# Altium PCB VariableBenchPowerSupply.PcbDoc
Units mil, origin at the board's own origin, x right, y up, seen from the top; angles counter-clockwise.
Board outline 3500 x 1500 mil, 2 copper layers (Top Layer, Bottom Layer); 36 components, 10 nets, 68 pads, 1 vias.
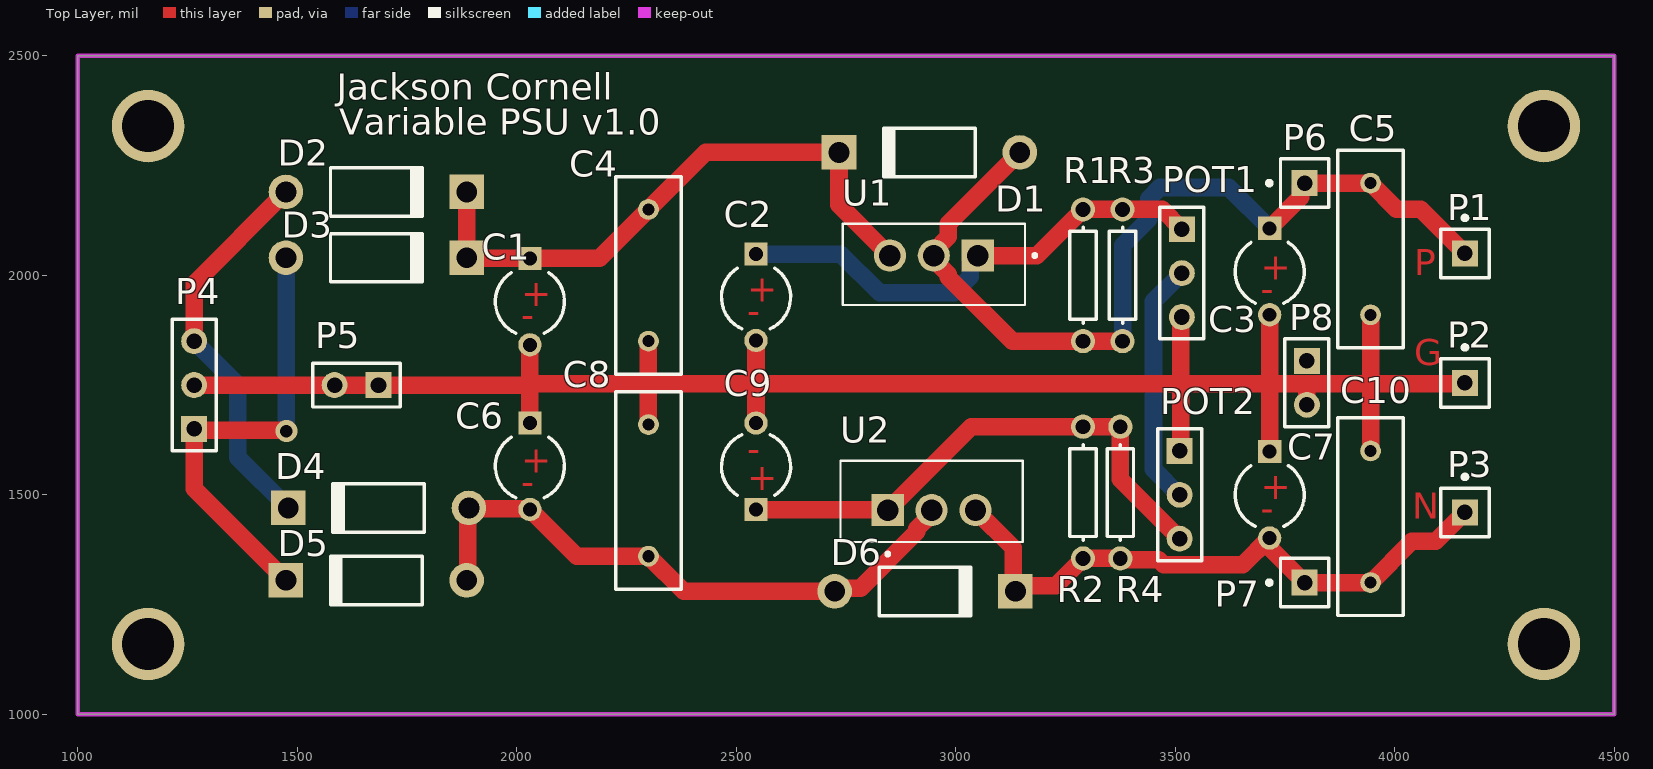
[diagram p0: Top Layer view]
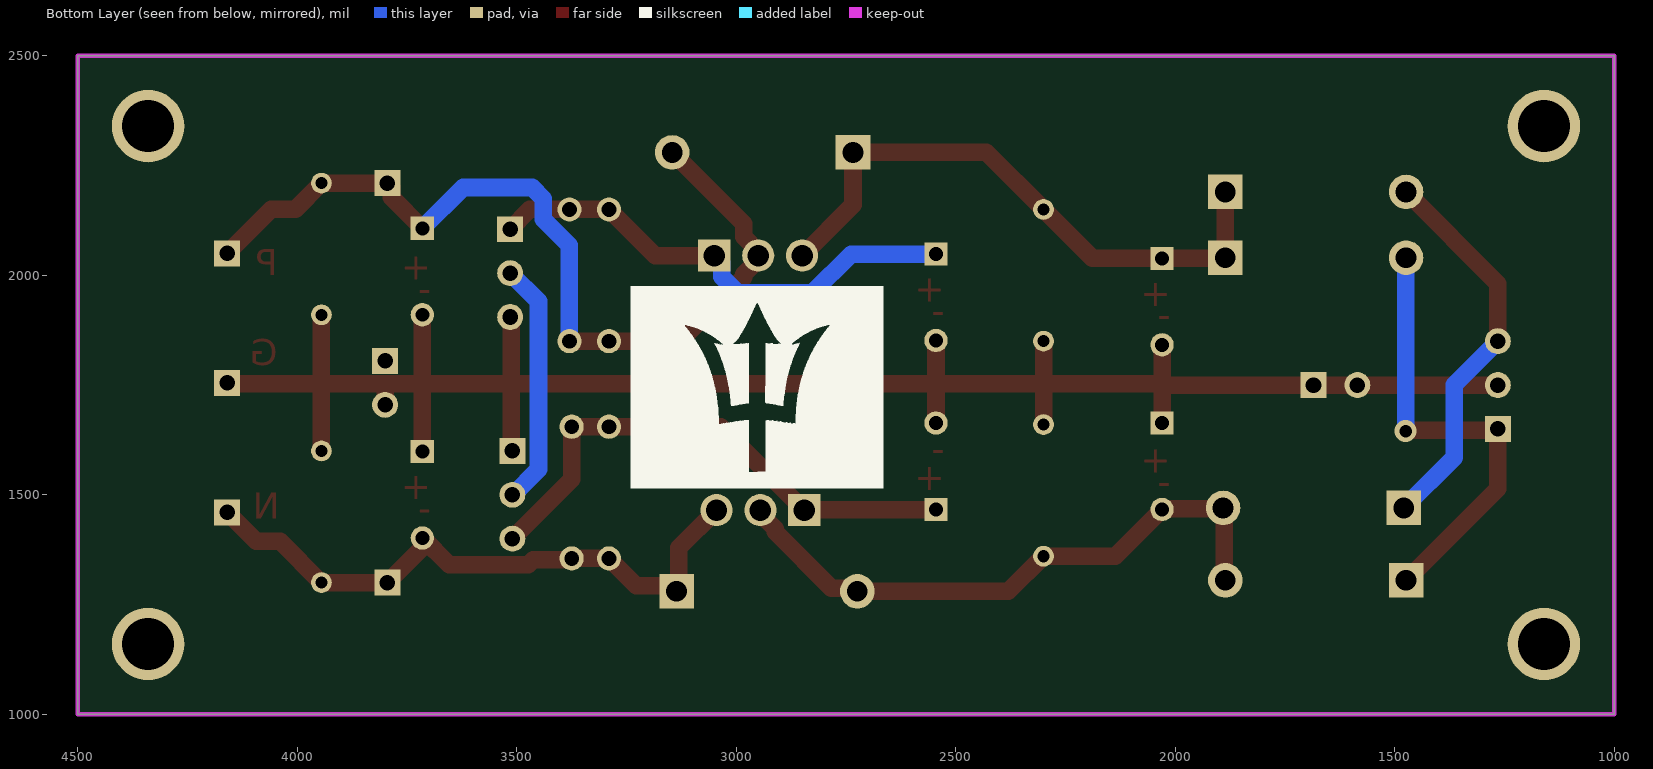
[diagram p1: Bottom Layer view, seen from below]

## Layer stack, top to bottom
Top Solder: solder mask 0.4, Solder Resist, Dk 3.5
Top Layer: signal copper 1.4
Dielectric 1: dielectric 12.6, FR-4, Dk 4.8
Bottom Layer: signal copper 1.4
Bottom Solder: solder mask 0.4, Solder Resist, Dk 3.5

## Board outline
1000,1000 1000,2500 4500,2500 4500,1000

## Design rules (kind name [scope] priority, off if disabled: settings)
Clearance [All] p1: gap=10 ignorepadtopadclearanceinfootprint=FALSE except(0: Arc-Hole Track-Hole SMDPad-Hole THPad-Hole Via-Hole Fill-Hole Poly-Hole Region-Hole Text-Hole)
PolygonConnect [All] p1: connectstyle=Relief reliefconductorwidth=10 reliefentries=4 polygonreliefangle="90 Angle" airgapwidth=10
RoutingVias [All] p1: holewidth=28 width=50 viastyle="Through Hole" minholewidth=28 minwidth=50 maxholewidth=28 maxwidth=50
SolderMaskExpansion [All] p1: expansion=4
Width [All] p1: maxlimit=40 minlimit=40 preferedwidth=40 minimp=50.000000 maximp=50.000000 favimp=50.000000
30 further rules are at their usual default settings.

## Classes and differential pairs
component class VariableBenchPowerSupply: C1 C2 C3 C4 C5 C6 C7 C8 C9 C10 D1 D2 D3 D4 D5 D6 P1 P2 P3 P4 P5 POT1 POT2 R1 R2 U1 U2

## Components (designator, comment, footprint, x,y, rotation, side; value= is the part's Value field where it differs from the comment)
C1 "Cap Pol1" CAPR5-4X5 2030,1940 r270 top value=2200uF
C2 "Cap Pol1" CAPR5-4X5 2545,1950 r270 top value=10uF
C3 "Cap Pol1" CAPR5-4X5 3715,2008.43 r270 top value=470uF
C4 "Cap" RAD-0.3 2300,2000 r90 top value=0.1-1uF
C5 "Cap" RAD-0.3 3945,2060 r270 top value=0.1-1uF
C6 "Cap Pol1" CAPR5-4X5 2030,1565 r270 top value=2200uF
C7 "Cap Pol1" CAPR5-4X5 3715,1500 r270 top value=470uF
C8 "Cap" RAD-0.3 2300,1510 r90 top value=0.1-1uF
C9 "Cap Pol1" CAPR5-4X5 2545,1565 r90 top value=10uF
C10 "Cap" RAD-0.3 3945,1450 r270 top value=0.1-1uF
D1 "Diode 1N4003" DO-41 2940,2280 r180 top
D2 "Diode 1N4003" DO-41 1680,2190 r0 top
D3 "Diode 1N4003" DO-41 1680,2040 r0 top
D4 "Diode 1N4003" DO-41 1685,1470 r180 top
D5 "Diode 1N4003" DO-41 1680,1305 r180 top
D6 "Diode 1N4003" DO-41 2930,1280 r0 top
P1 "Plug" PIN1 4160,2050 r0 top
P2 "Plug" PIN1 4160,1755 r0 top
P3 "Plug" PIN1 4160,1460 r0 top
P4 "Header 3" HDR1X3 1265,1650 r90 top
P5 "Header 2" HDR1X2 1685,1750 r180 top
P6 "Comment" PIN1 3795,2210 r90 top
P7 "Comment" PIN1 3795,1300 r90 top
P8 "Comment" HDR1X2 3800,1805 r270 top
POT1 "5K" HDR1X3 3515,2105 r270 top
POT2 "5K" HDR1X3 3510,1600 r270 top
R1 "Res1" AXIAL-0.3 3290,2000 r270 top value=240
R2 "Res1" AXIAL-0.3 3290,1505 r90 top value=240
R3 "Comment" AXIAL-0.3 3380,2000 r90 top
R4 "Comment" AXIAL-0.3 3375,1505 r90 top
U1 "LM317T" TO254P1054X470X1955-3 2950,2045 r180 top
U2 "LM337T" TO254P1054X470X1955-3 2945,1465 r0 top
? "Comment" "Hole 3mm" 1160,1160 r90 top
? "Comment" "Hole 3mm" 4340,1160 r90 top
? "Comment" "Hole 3mm" 4340,2340 r90 top
? "Comment" "Hole 3mm" 1160,2340 r90 top

## Footprints (in the part's own frame and the unit in brackets; to place one, negate y for a bottom-side part, rotate by r counter-clockwise, add the part's x,y. Pads: shape width x height; smd on the part's side, far side on the other; paste and mask are expansions set on the pad)
AXIAL-0.3 [mm] "Axial Device, Thru-Hole; 2 Leads; 0.3 in Pin Spacing"
  round 1.4 hole 0.85: 1(-3.81,0) 2(3.81,0)
  silkscreen extent -2.77,-0.76 2.77,0.76
CAPR5-4X5 [mm] "Capacitor; 2 Leads"
  rect 1.35x1.35 hole 0.8: 1(-2.5,0)
  round 1.35 hole 0.8: 2(2.5,0)
  silkscreen extent -1.69,-2 1.82,2
DO-41 [mm] "Diode, Axial; Body 5.2 x 2.7 mm (LxDia. max), Lead Dia. 0.86 mm (max)"
  round 2 hole 1.2: 1(-5.23,0)
  rect 2x2 hole 1.2: 2(5.23,0)
  silkscreen extent -2.65,-1.4 2.75,1.4
HDR1X2 [mm] "Connector; Header; 2 Position"
  rect 1.5x1.5 hole 0.9: 1(0,0)
  round 1.5 hole 0.9: 2(2.54,0)
  silkscreen extent -1.27,-1.27 3.81,1.27
HDR1X3 [mm] "Connector; Header; 3 Position"
  rect 1.5x1.5 hole 0.9: 1(0,0)
  round 1.5 hole 0.9: 2(2.54,0) 3(5.08,0)
  silkscreen extent -1.27,-1.27 6.35,1.27
"Hole 3mm" [mil]
  round 165 hole 118.11: 1(0,0)
PIN1 [mm] "Connector; Plug"
  rect 1.5x1.5 hole 0.9: 1(0,0)
  silkscreen extent -1.4,-1.4 1.4,2.17
RAD-0.3 [mm] "Radial Cap, Thru-Hole; 2 Leads; 0.3 in Pin Spacing"
  round 1.2 hole 0.7: 1(-3.81,0) 2(3.81,0)
  silkscreen extent -5.71,-1.91 5.71,1.91
TO254P1054X470X1955-3 [mm]
  rect 1.86x1.86 hole 1.24: 1(-2.54,0)
  round 1.86 hole 1.24: 2(0,0) 3(2.54,0)
  silkscreen extent -5.94,-1.84 5.27,2.86

## Part data
C1 C2 C3 C6 C7 C9: "Polarized Capacitor (Radial)", LatestRevisionDate=17-Jul-2002, LatestRevisionNote="Re-released for DXP Platform.", PackageDescription="Polarized Capacitor (Radial); 2 Leads", PackageReference=RB7.6-15, Published=8-Jun-2000, Publisher="Altium Limited"
C4 C5 C8 C10: "Capacitor", LatestRevisionDate=17-Jul-2002, LatestRevisionNote="Re-released for DXP Platform.", PackageDescription="Radial Cap, Thru-Hole; 2 Leads; 0.3 in Pin Spacing", PackageReference=RAD-0.3, Published=8-Jun-2000, Publisher="Altium Limited"
D1 D2 D3 D4 D5 D6: "1 Amp General Purpose Rectifier", Code_JEDEC=DO-204-AL, ComponentLink1Description="Manufacturer Link", ComponentLink1URL=http://www.fairchildsemi.com/, ComponentLink2Description=Datasheet, ComponentLink2URL=http://www.fairchildsemi.com/ds/1N%2F1N4001.pdf, DatasheetVersion=1998, LatestRevisionDate=17-Jul-2002, LatestRevisionNote="Re-released for DXP Platform.", PackageDescription="Diode, Axial; Body 5.2 x 2.7 mm (LxDia. max), Lead Dia. 0.86 mm (max)", PackageReference=DO-41, PackageVersion=Aug-1999, Published=8-Jun-2000, Publisher="Altium Limited"
P4: "Header, 3-Pin", LatestRevisionDate=17-Jul-2002, LatestRevisionNote="Re-released for DXP Platform.", Publisher="Altium Limited"
P5: "Header, 2-Pin", LatestRevisionDate=17-Jul-2002, LatestRevisionNote="Re-released for DXP Platform.", Publisher="Altium Limited"
POT1 POT2: library part "Header 3", "Header, 3-Pin", LatestRevisionDate=17-Jul-2002, LatestRevisionNote="Re-released for DXP Platform.", Publisher="Altium Limited"
R1 R2: "Resistor", LatestRevisionDate=17-Jul-2002, LatestRevisionNote="Re-released for DXP Platform.", PackageDescription="Axial Device, Thru-Hole; 2 Leads; 0.3 in Pin Spacing", PackageReference=AXIAL-0.3, Published=8-Jun-2000, Publisher="Altium Limited"
U1: library part LM317T/NOPB, "1.5-A, 40-V, adjustable linear voltage regulator 3-TO-220 0 to 125", Package="TO-220-3 Texas Instruments", Availability=Good, DigiKey-Purchase-URL=https://snapeda.com/shop?store=DigiKey&id=358009, MF="Texas Instruments", Mouser-Purchase-URL=https://snapeda.com/shop?store=Mouser&id=358009, MP=LM317T/NOPB, Price=None, SnapEDA_Link=https://www.snapeda.com/parts/LM317T/NOPB/Texas%20Instruments/view-part/358009/?ref=snap, Texas_Instruments-Purchase-URL=https://snapeda.com/shop?store=Texas+Instruments&id=358009
U2: "Linear Voltage Regulator IC 1 Output 1.5A TO-220AB", Package="TO-220 Linear Technology", Arrow_Electronics-Purchase-URL=https://snapeda.com/shop?store=Arrow+Electronics&id=2472851, Availability=Good, DigiKey-Purchase-URL=https://snapeda.com/shop?store=DigiKey&id=2472851, MF="ON Semiconductor", MP=LM337T, Price=None, SnapEDA_Link=https://www.snapeda.com/parts/LM337T/ON%20Semiconductor/view-part/2472851/?ref=snap
P1 P2 P3: LatestRevisionDate=17-Jul-2002, LatestRevisionNote="Re-released for DXP Platform.", Publisher="Altium Limited"

## Via types
v1: diameter 50, hole 28, Top Layer to Bottom Layer, 1 vias

## Nets (pads, with @x,y where several pads share a name; then routed paths per layer and width w, separated by ;. In a path a pad name is that pad's centre, name@x,y a point inside that pad or via, vN(x,y) a via of type N, cw(c..) or ccw(c..) an arc to the next point about the centre after c; other vN are vias at no path point)
+Vcc: C3.1 C5.1 D1.1 P1.1 P6.1 R1.2 R3.1 U1.2 | length 2077.4
  Top Layer w40: D1.1 2983.39,2117.48 2983.39,2087.38 2950,2053.99 U1.2 2950,2036.01 2983.39,2002.62 2983.39,1995.96 3129.35,1850 R1.2 R3.1 ; C3.1 3785.47,2177.32 3785.47,2200.47 P6.1 C5.1 4004.13,2150.87 4059.13,2150.87 P1.1
  Bottom Layer w40: R3.1 3380,2068.6 3439.46,2128.06 3439.46,2174.46 3465,2200 3621.85,2200 C3.1
-Vcc: C7.2 C10.2 D6.2 P3.1 P7.1 R2.1 R4.1 U2.3 | length 1430.1
  Top Layer w40: U2.3 3130.63,1379.37 3130.63,1285.28 D6.2 3148.99,1293.09 3228.09,1293.09 R2.1 R4.1 3377.89,1352.11 3461.98,1352.11 3473.62,1340.47 3653.67,1340.47 3714.77,1401.57 C7.2 3717.52,1399.06 3717.52,1377.48 P7.1 C10.2 4038.9,1393.9 4093.9,1393.9 P3.1
GND: C1.2 C2.2 C3.2 C4.1 C5.2 C6.1 C7.1 C8.2 C9.2 C10.1 P2.1 P4.2 P5.1 P5.2 P8.1 P8.2 POT1.3 POT2.1 | length 4438.1
  Top Layer w40: P4.2 P5.2 P5.1 2027.5,1750 2030,1752.5 ; C6.1 2030,1752.5 ; C1.2 2030,1752.5 ; C8.2 2300,1752.5 ; C4.1 2300,1752.5 ; C9.2 2545,1752.5 ; C2.2 2545,1752.5 ; C2.2@2547.5,1849.08 C2.2@2550,1851.57 ; POT2.1 3512.5,1602.5 3512.5,1752.5 ; POT1.3 3512.5,1902.5 3512.5,1752.5 ; C7.1 3715,1752.5 ; C3.2 3715,1752.5 ; P8.2@3800,1700 3800,1752.5 ; C10.1 3945,1752.5 ; C5.2 3945,1752.5 ; P2.1 4157.5,1752.5 3945,1752.5 ; 2030,1752.5 2300,1752.5 ; 2300,1752.5 2545,1752.5 ; 2545,1752.5 3512.5,1752.5 ; 3512.5,1752.5 3715,1752.5 ; 3715,1752.5 3800,1752.5 ; 3800,1752.5 3945,1752.5
NetC1_1: C1.1 C4.2 D1.2 D2.2 D3.2 U1.3 | length 1385.5
  Top Layer w40: D2.2@1883.41,2187.5 D2.2 D3.2 1886.69,2039.21 2029.21,2039.21 C1.1 2188.43,2038.43 C4.2 2430,2280 D1.2 2734.09,2160.91 U1.3
NetC2_1: C2.1 POT1.1 R1.1 R3.2 U1.1 | length 1122.5
  Top Layer w40: U1.1 3185,2045 R1.1 R3.2 3470,2150 POT1.1
  Bottom Layer w40: C2.1 2738.29,2048.43 2826.71,1960 2996.57,1960 3033.39,1996.82 3033.39,2028.39 U1.1
NetC6_2: C6.2 C8.1 D4.1 D5.1 D6.1 U2.2 | length 1385.7
  Top Layer w40: D5.1 1888.41,1307.5 1888.41,1467.5 D4.1 1892.62,1468.29 2028.29,1468.29 C6.2 2136.57,1360 C8.1 2380,1280 D6.1 2731.51,1287.41 2783.07,1287.41 2911.61,1415.96 2911.61,1422.62 2945,1456.01 U2.2
NetC9_1: C9.1 POT2.3 R2.2 R4.2 U2.1 | length 1220.3
  Top Layer w40: C9.1 2545.79,1465.79 2844.21,1465.79 U2.1 3035,1655 R2.2 R4.2 3375,1535 POT2.3
NetD2_1: D2.1 D4.2 P4.3 | length 895.3
  Top Layer w40: P4.3 1265,1980.91 D2.1
  Bottom Layer w40: P4.3 1364.19,1750.81 1364.19,1584.91 D4.2
NetD3_1: D3.1 D5.2 P4.1 | length 1049.5
  Top Layer w40: D5.2 1265,1514.09 P4.1 1268.09,1646.91 1473.09,1646.91 v1(1475,1645)
  Bottom Layer w40: D3.1@1474.09,2029.52 D3.1 1474.55,2039.55 1474.55,1645.45 v1(1475,1645)
NetPOT1_2: POT1.2 POT2.2 | length 557.3
  Bottom Layer w40: POT2.2 3508.52,1500 3450.47,1558.05 3450.47,1940.47 POT1.2
pads on no net: ?.1

## Polygon pours and split planes (outlines as drawn)
NetD2_1 on Bottom Layer "Bottom Layer-NetD2_1" (hatched 45Degree grid 20 track 8, shelved, pour order 6): 1000,1000 1000,2500 4500,2500 4500,1000
GND on Top Layer "Top Layer-GND" (hatched 45Degree grid 20 track 10, shelved, pour order 2): 1000,1000 1000,2500 4500,2500 4500,1000

## Keep-outs
Keep-Out Layer:
  the board outline again, w10

## Other copper
Top Layer:
  region: 910,3703 918,3703 918,3695 926,3695 926,3687 934,3687 934,3679 926,3679 926,3687 918,3687 918,3695 902,3695 902,3703 902,3711 910,3711
  region: 918,3711 926,3711 926,3703 934,3703 934,3695 926,3695 926,3703 918,3703 918,3711 910,3711 910,3719 918,3719
  region: 854,3711 862,3711 862,3703 870,3703 870,3695 862,3695 862,3703 854,3703 854,3711 846,3711 846,3719 854,3719
  region: 1080,5303 1088,5303 1088,5295 1096,5295 1096,5287 1104,5287 1104,5279 1096,5279 1096,5287 1088,5287 1088,5295 1072,5295 1072,5303 1072,5311 1080,5311
  region: 1088,5311 1096,5311 1096,5303 1104,5303 1104,5295 1096,5295 1096,5303 1088,5303 1088,5311 1080,5311 1080,5319 1088,5319
  region: 1024,5311 1032,5311 1032,5303 1040,5303 1040,5295 1032,5295 1032,5303 1024,5303 1024,5311 1016,5311 1016,5319 1024,5319
  text "P" at 4045,2000 h60
  text "+" at 3695,1990 h60
  text "+" at 2525,1940 h60
  text "-" at 3695,1940 h60
  text "+" at 2010,1930 h60
  text "-" at 2525,1890 h60
  text "-" at 2010,1880 h60
  text "G" at 4045,1795 h60
  text "-" at 2525,1575 h60
  text "+" at 2010,1550 h60
  text "+" at 2525,1510 h60
  text "-" at 2010,1500 h60
  text "+" at 3695,1490 h60
  text "N" at 4040,1445 h60
  text "-" at 3695,1440 h60

## Silkscreen, mask and mechanical layers (free items; w line width, h text height)
Top Overlay:
  text "Jackson Cornell" at 1590,2400 h60
  text "Variable PSU v1.0" at 1595,2320 h60
Bottom Overlay:
  region: 1497 vertices and 1 holes, not listed, extent 2664.7,1514.89 3240,1975